# EAGLE board seamonster_buffered1 (EAGLE 8.2.1)
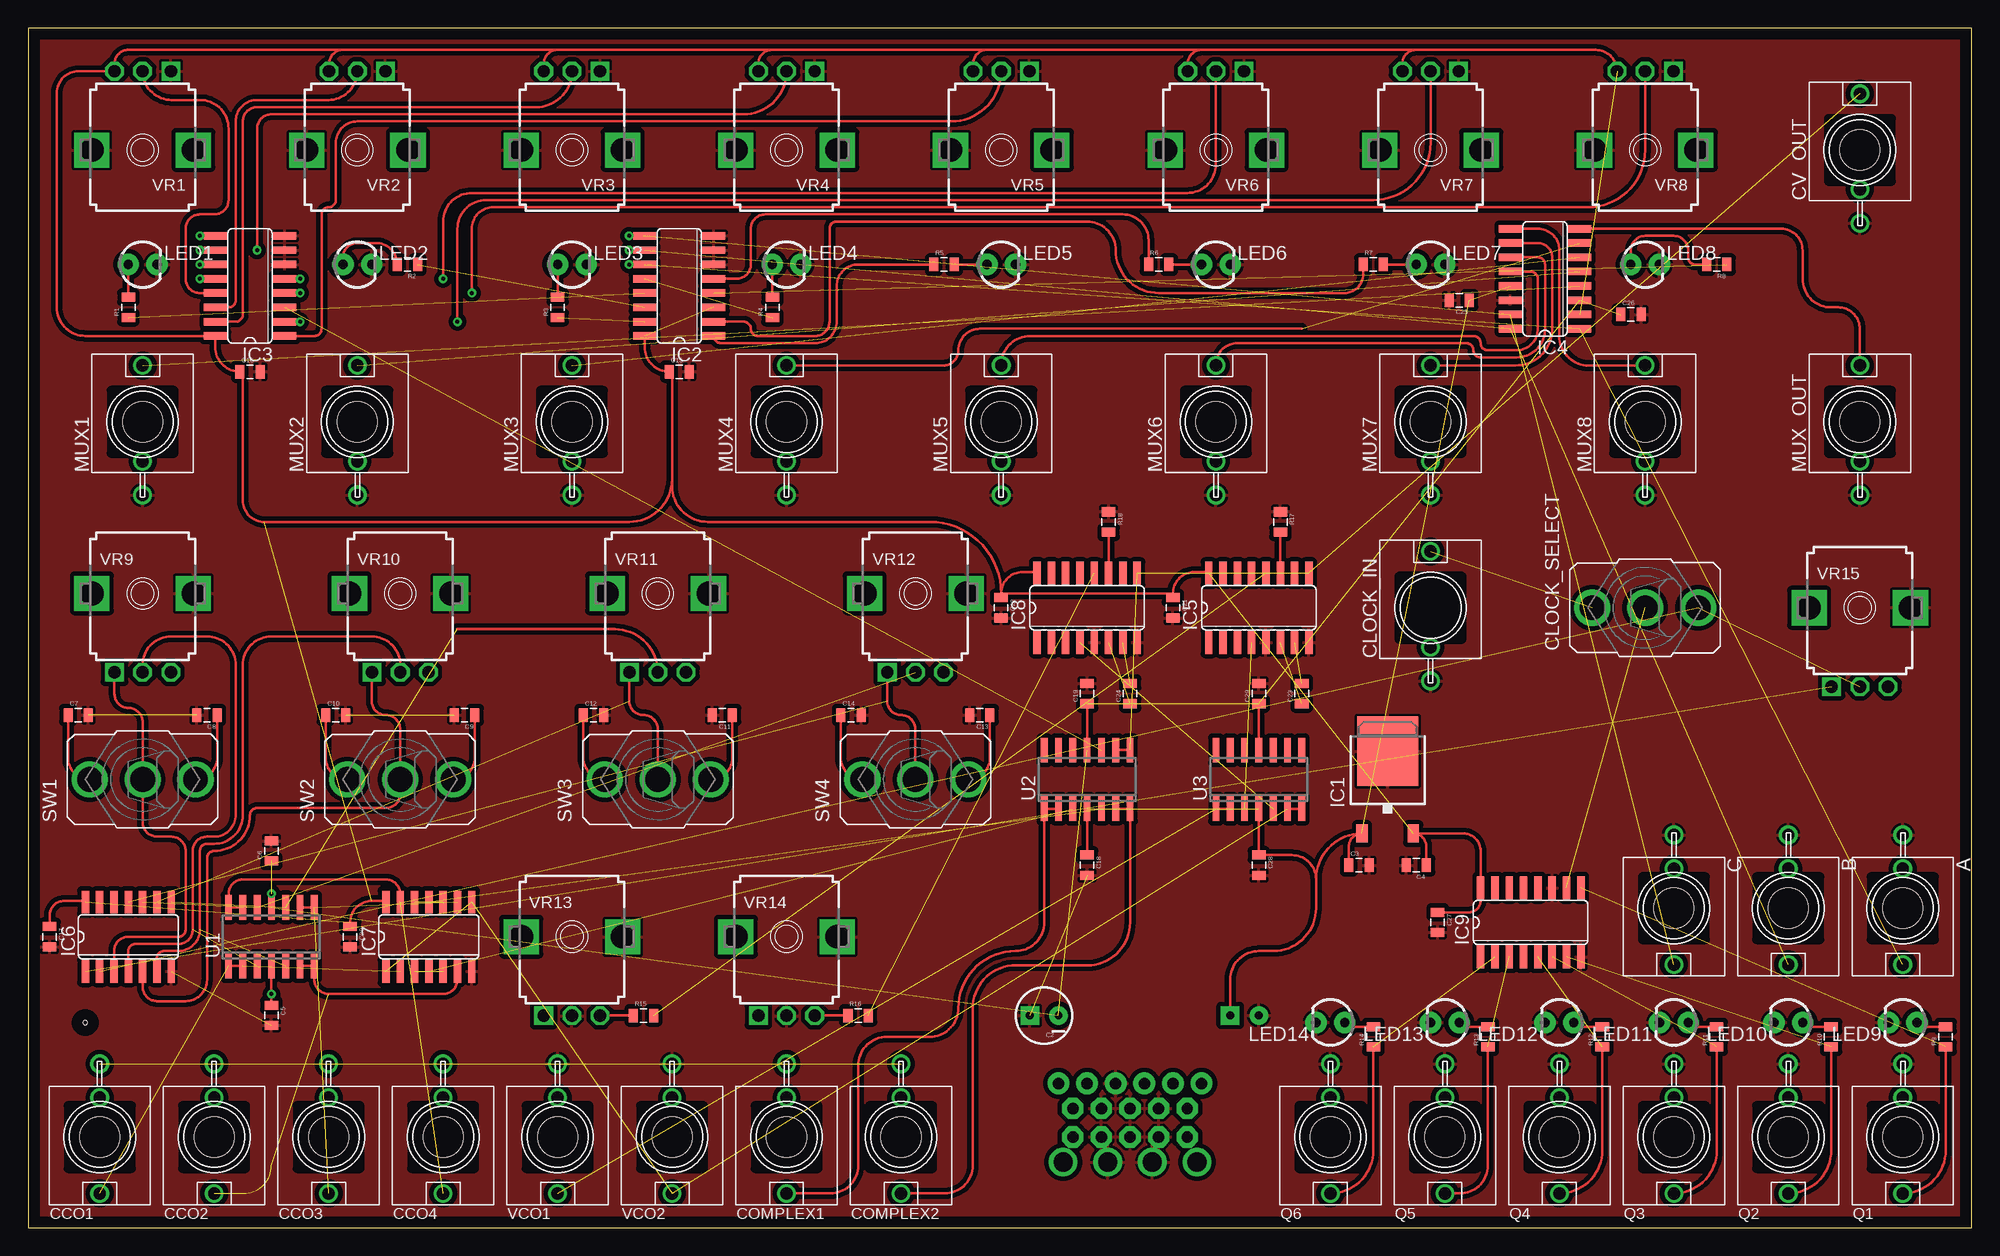
[diagram p0: board, top side]
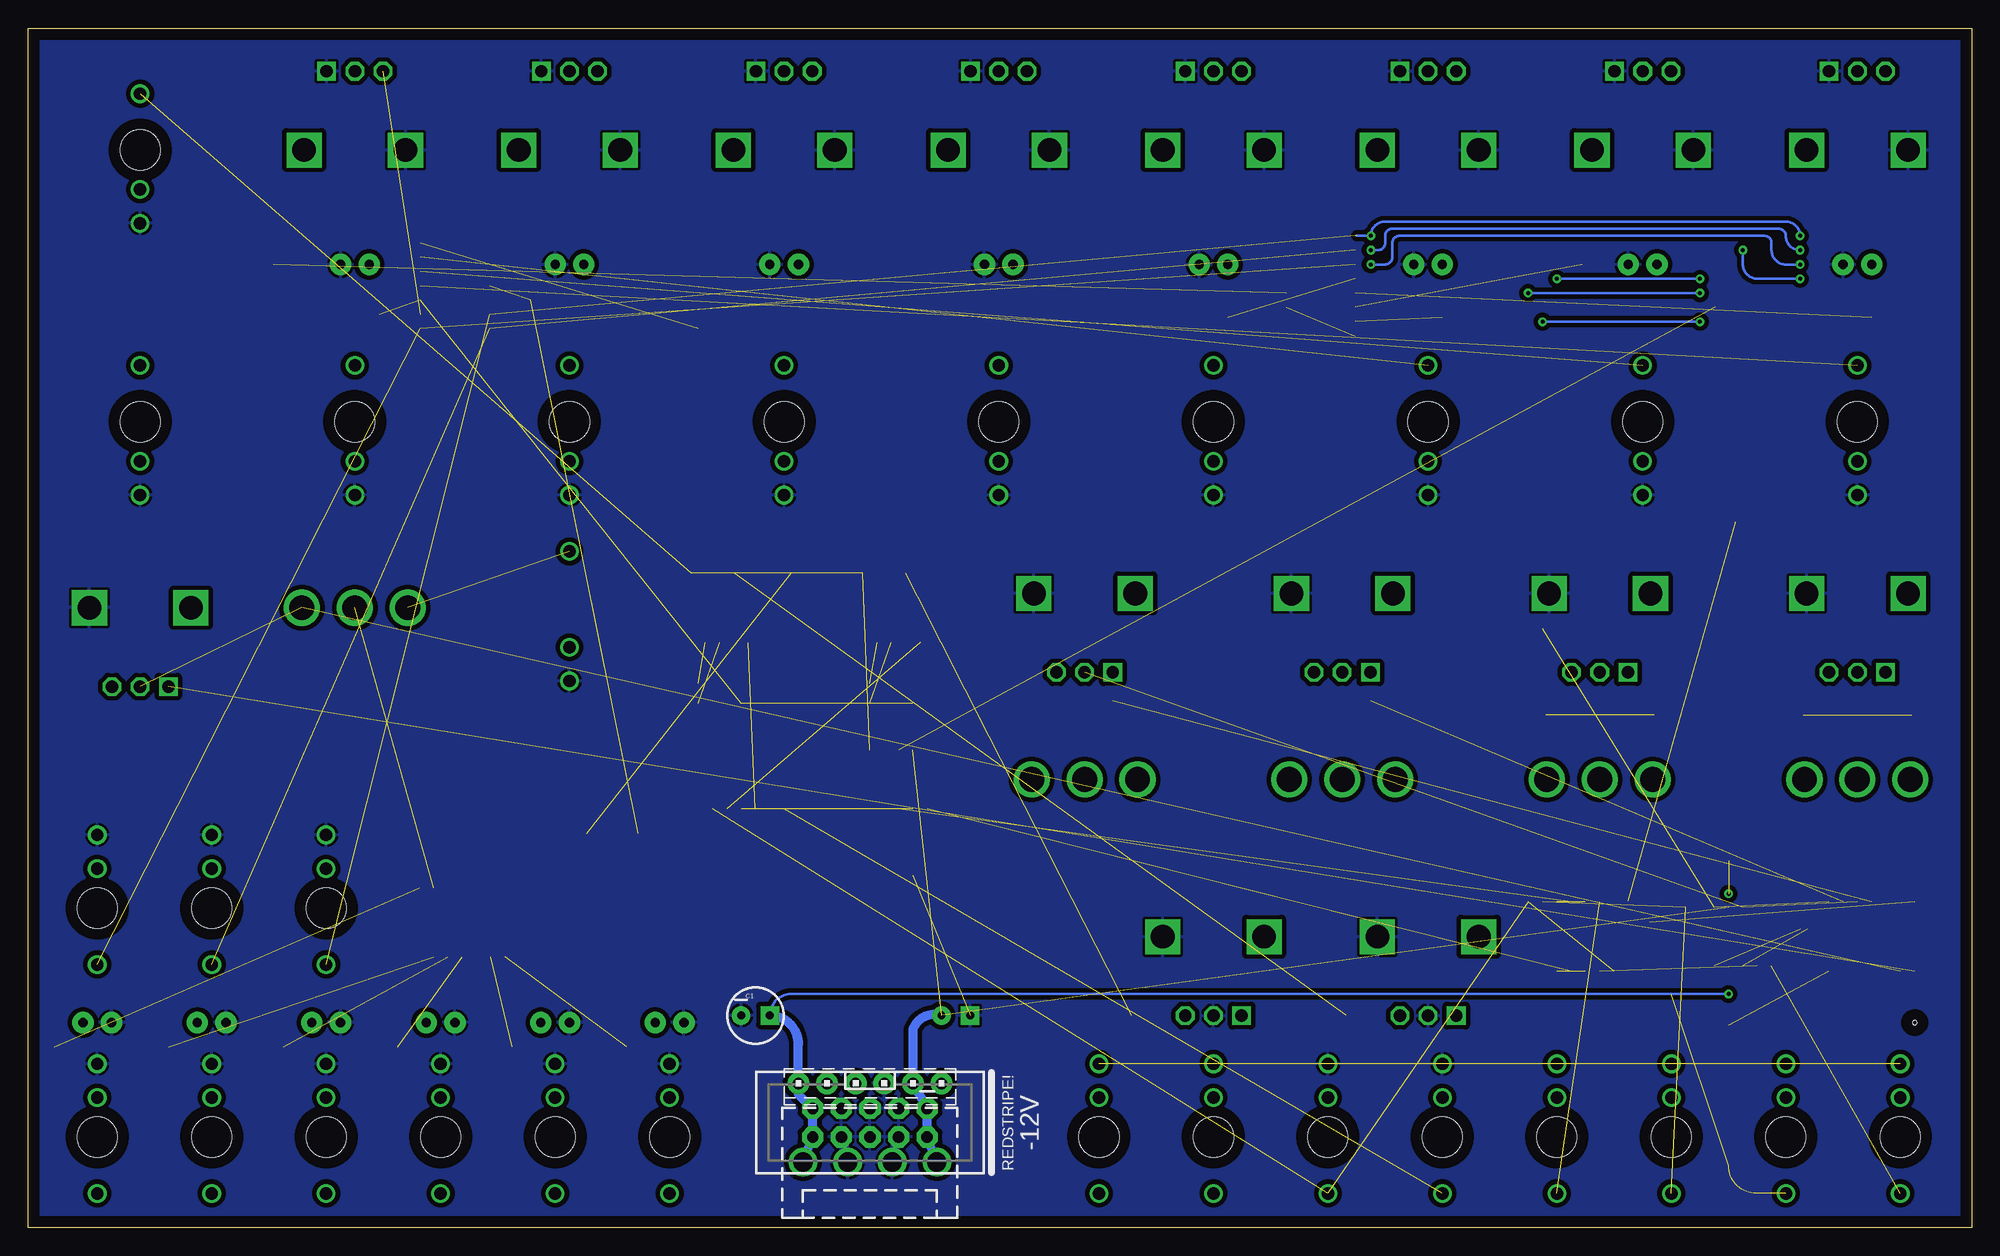
[diagram p1: board, bottom side, seen from below]

Size 172.5 x 106.5 mm. Coordinates in mm from the lower left corner, seen from the top.
Outline: 0,0 172.5,0 172.5,106.5 0,106.5 0,0
Copper layers (1*16): Top 0.035mm / dielectric 1.5mm / Bottom 0.035mm
Design rules "default": minimum track width 6mil, minimum drill 0.35mm, track to track 6mil, track to pad 6mil, pad to pad 6mil, via to via 6mil, smd to smd 6mil, copper to edge 40mil, drill to drill 6mil, minimum pad ring 10mil, minimum via ring 8mil, stop-mask expansion 4mil, vias tented up to drill 0mil, thermal gap 10mil
Holes 0.35 mm at 5.08,18.21
Holes 3.56 mm at 6.35,8.05 16.51,8.05 26.67,8.05 36.83,8.05 46.99,8.05 57.15,8.05 67.31,8.05 77.47,8.05 115.57,8.05 125.73,8.05 135.89,8.05 146.05,8.05 156.21,8.05 166.37,8.05 166.37,28.37 156.21,28.37 146.05,28.37 10.16,71.55 29.21,71.55 48.26,71.55 67.31,71.55 86.36,71.55 105.41,71.55 124.46,71.55 143.51,71.55 162.56,71.55 162.56,95.68

## Footprints (pad centres in the part's own frame; a part is rotated, then mirrored left to right if it is on the bottom)
WQP-PJ301M-12_JACK = drill 1.1: P$1_TIP 0,5; P$2_SWITCH 0,-3.5; P$3_SLEEVE 0,-6.5
CPOL-RADIAL-10UF-25V = drill 0.7 pad 1.651 square: 1 1.27,0 | drill 0.7 pad 1.651: 2 -1.27,0
0805 = smd 0.8 x 1.2: 1 -0.9,0; 2 0.9,0
M9040P = drill 2.2: 1 0,4.699 | drill 2.2 pad 3: 2 0,0; 3 0,-4.699
TO252 = smd 1 x 1.6: 1 -2.28,-4.8; 2 2.28,-4.8 | smd 5.4 x 6.2: 3 0,2.5
SO16 = smd 0.66 x 2.032: 1 -4.445,-3.073; 2 -3.175,-3.073; 3 -1.905,-3.073; 4 -0.635,-3.073; 5 0.635,-3.073; 6 1.905,-3.073; 7 3.175,-3.073; 8 4.445,-3.073; 9 4.445,3.073; 10 3.175,3.073; 11 1.905,3.073; 12 0.635,3.073; 13 -0.635,3.073; 14 -1.905,3.073; 15 -3.175,3.073; 16 -4.445,3.073
SO14 = smd 0.66 x 2.032: 1 -3.81,-3.073; 2 -2.54,-3.073; 3 -1.27,-3.073; 4 0,-3.073; 5 1.27,-3.073; 6 2.54,-3.073; 7 3.81,-3.073; 8 3.81,3.073; 9 2.54,3.073; 10 1.27,3.073; 11 0,3.073; 12 -1.27,3.073; 13 -2.54,3.073; 14 -3.81,3.073
LED3MM = drill 0.813 pad 1.88: A -1.27,0; K 1.27,0
SO14' = smd 0.6 x 2.2: 1 -3.81,-2.6; 2 -2.54,-2.6; 3 -1.27,-2.6; 4 0,-2.6; 5 1.27,-2.6; 6 2.54,-2.6; 7 3.81,-2.6; 8 3.81,2.6; 9 2.54,2.6; 10 1.27,2.6; 11 0,2.6; 12 -1.27,2.6; 13 -2.54,2.6; 14 -3.81,2.6
COMBO_POWER = drill 1.016 pad 1.93: +5V-DOTCOM 1.27,-3.493; COM-DOTCOM -1.27,-3.493; KEY-DOTCOM 3.81,-3.493; NA-DOTCOM -6.35,-3.493; V+DOTCOM 6.35,-3.493; V-DOTCOM -3.81,-3.493 | drill 1.016 pad 1.88 octagon: COM-EURO1 -2.54,-1.27; COM-EURO2 -2.54,1.27; COM-EURO3 0,-1.27; COM-EURO4 0,1.27; COM-EURO5 2.54,-1.27; COM-EURO6 2.54,1.27; V+EURO1 5.08,-1.27; V+EURO2 5.08,1.27; V-EURO1 -5.08,-1.27; V-EURO2 -5.08,1.27 | drill 1.7 pad 2.54: COM-MOTM1 1.98,3.493; COM_MOTM2 -1.98,3.493; V+MOTM 5.94,3.493; V-MOTM -5.94,3.493
9MM_SNAP-IN_POT = drill 1.1 square: 1 -2.5,-7 | drill 1.1 octagon: 2 0,-7; 3 2.5,-7 | drill 2.1 square: CHASSIS1 -4.5,0; CHASSIS2 4.5,0

## Placement (x,y rotation side)
A  THONKICONNNEW  [WQP-PJ301M-12_JACK]  166.37,28.37 180 top
B  THONKICONNNEW  [WQP-PJ301M-12_JACK]  156.21,28.37 180 top
C  THONKICONNNEW  [WQP-PJ301M-12_JACK]  146.05,28.37 180 top
C1  47µF  [CPOL-RADIAL-10UF-25V]  107.95,18.84 0 bottom
C2  47µF  [CPOL-RADIAL-10UF-25V]  90.17,18.84 180 top
C3  0.1µF  [0805]  118.11,32.18 0 top
C4  0.1µF  [0805]  123.19,32.18 180 top
C5  0.1µF  [0805]  21.59,18.84 270 top
C6  0.1µF  [0805]  21.59,33.45 90 top
C7  0.1µF  [0805]  4.45,45.52 0 top
C8  1µF  [0805]  15.88,45.52 180 top
C9  1µF  [0805]  38.73,45.52 180 top
C10  0.1µF  [0805]  27.3,45.52 0 top
C11  1µF  [0805]  61.59,45.52 180 top
C12  0.1µF  [0805]  50.16,45.52 0 top
C13  1µF  [0805]  84.45,45.52 180 top
C14  0.1µF  [0805]  73.03,45.52 0 top
C15  0.1µF  [0805]  57.78,76 0 top
C16  0.1µF  [0805]  19.68,76 0 top
C17  0.1µF  [0805]  1.91,25.83 270 top
C18  0.1µF  [0805]  93.98,32.18 270 top
C19  0.1µF  [0805]  93.98,47.42 90 top
C20  0.1µF  [0805]  28.57,25.83 270 top
C21  0.1µF  [0805]  101.6,55.04 270 top
C22  0.1µF  [0805]  86.36,55.04 270 top
C23  1µF  [0805]  113.03,47.42 90 top
C24  1µF  [0805]  97.79,47.42 90 top
C25  0.1µF  [0805]  127,82.34 180 top
C26  0.1µF  [0805]  142.24,81.08 0 top
C27  0.1µF  [0805]  125.09,27.1 270 top
C28  0.1µF  [0805]  109.22,32.18 270 top
C29  0.1µF  [0805]  109.22,47.42 90 top
CCO1  THONKICONNNEW  [WQP-PJ301M-12_JACK]  6.35,8.05 180 top
CCO2  THONKICONNNEW  [WQP-PJ301M-12_JACK]  16.51,8.05 180 top
CCO3  THONKICONNNEW  [WQP-PJ301M-12_JACK]  26.67,8.05 180 top
CCO4  THONKICONNNEW  [WQP-PJ301M-12_JACK]  36.83,8.05 180 top
CLOCK_IN  THONKICONNNEW  [WQP-PJ301M-12_JACK]  124.46,55.04 0 top
CLOCK_SELECT  SPDT ON-ON  [M9040P]  143.51,55.04 90 top
COMPLEX1  THONKICONNNEW  [WQP-PJ301M-12_JACK]  67.31,8.05 180 top
COMPLEX2  THONKICONNNEW  [WQP-PJ301M-12_JACK]  77.47,8.05 180 top
CV_OUT  THONKICONNNEW  [WQP-PJ301M-12_JACK]  162.56,95.68 0 top
IC1  7808DT  [TO252]  120.65,39.8 0 top
IC2  4051D  [SO16]  57.78,83.61 90 top
IC3  4051D  [SO16]  19.68,83.61 90 top
IC4  DG408DY  [SO16]  134.62,84.25 90 top
IC5  4046D  [SO16]  109.22,55.04 0 top
IC6  40106D  [SO14]  8.89,25.83 0 top
IC7  4070D  [SO14]  35.56,25.83 0 top
IC8  4046D  [SO16]  93.98,55.04 0 top
IC9  4040D  [SO16]  133.35,27.1 0 top
LED1  [LED3MM]  10.16,85.52 0 top
LED2  [LED3MM]  29.21,85.52 0 top
LED3  [LED3MM]  48.26,85.52 0 top
LED4  [LED3MM]  67.31,85.52 0 top
LED5  [LED3MM]  86.36,85.52 0 top
LED6  [LED3MM]  105.41,85.52 0 top
LED7  [LED3MM]  124.46,85.52 0 top
LED8  [LED3MM]  143.51,85.52 0 top
LED9  [LED3MM]  166.37,18.21 180 top
LED10  [LED3MM]  156.21,18.21 180 top
LED11  [LED3MM]  146.05,18.21 180 top
LED12  [LED3MM]  135.89,18.21 180 top
LED13  [LED3MM]  125.73,18.21 180 top
LED14  [LED3MM]  115.57,18.21 180 top
MUX1  THONKICONNNEW  [WQP-PJ301M-12_JACK]  10.16,71.55 0 top
MUX2  THONKICONNNEW  [WQP-PJ301M-12_JACK]  29.21,71.55 0 top
MUX3  THONKICONNNEW  [WQP-PJ301M-12_JACK]  48.26,71.55 0 top
MUX4  THONKICONNNEW  [WQP-PJ301M-12_JACK]  67.31,71.55 0 top
MUX5  THONKICONNNEW  [WQP-PJ301M-12_JACK]  86.36,71.55 0 top
MUX6  THONKICONNNEW  [WQP-PJ301M-12_JACK]  105.41,71.55 0 top
MUX7  THONKICONNNEW  [WQP-PJ301M-12_JACK]  124.46,71.55 0 top
MUX8  THONKICONNNEW  [WQP-PJ301M-12_JACK]  143.51,71.55 0 top
MUX_OUT  THONKICONNNEW  [WQP-PJ301M-12_JACK]  162.56,71.55 0 top
Q1  THONKICONNNEW  [WQP-PJ301M-12_JACK]  166.37,8.05 180 top
Q2  THONKICONNNEW  [WQP-PJ301M-12_JACK]  156.21,8.05 180 top
Q3  THONKICONNNEW  [WQP-PJ301M-12_JACK]  146.05,8.05 180 top
Q4  THONKICONNNEW  [WQP-PJ301M-12_JACK]  135.89,8.05 180 top
Q5  THONKICONNNEW  [WQP-PJ301M-12_JACK]  125.73,8.05 180 top
Q6  THONKICONNNEW  [WQP-PJ301M-12_JACK]  115.57,8.05 180 top
R1  [0805]  8.89,81.71 90 top
R2  [0805]  33.66,85.52 180 top
R3  [0805]  46.99,81.71 90 top
R4  [0805]  66.04,81.71 90 top
R5  [0805]  81.28,85.52 0 top
R6  [0805]  100.33,85.52 0 top
R7  [0805]  119.38,85.52 0 top
R8  [0805]  149.86,85.52 180 top
R9  [0805]  170.18,16.94 90 top
R10  [0805]  160.02,16.94 90 top
R11  [0805]  149.86,16.94 90 top
R12  [0805]  139.7,16.94 90 top
R13  [0805]  129.54,16.94 90 top
R14  [0805]  119.38,16.94 90 top
R15  [0805]  54.61,18.84 0 top
R16  [0805]  73.66,18.84 0 top
R17  [0805]  111.12,62.66 270 top
R18  [0805]  95.89,62.66 270 top
SW1  SPDT ON-ON  [M9040P]  10.16,39.8 90 top
SW2  SPDT ON-ON  [M9040P]  33.02,39.8 90 top
SW3  SPDT ON-ON  [M9040P]  55.88,39.8 90 top
SW4  SPDT ON-ON  [M9040P]  78.74,39.8 90 top
U1  TL084  [SO14']  21.59,25.83 0 top
U2  TL084  [SO14']  93.98,39.8 0 top
U3  TL084  [SO14']  109.22,39.8 0 top
U$1  COMBO_POWER  [COMBO_POWER]  97.79,9.32 180 bottom
VCO1  THONKICONNNEW  [WQP-PJ301M-12_JACK]  46.99,8.05 180 top
VCO2  THONKICONNNEW  [WQP-PJ301M-12_JACK]  57.15,8.05 180 top
VR1  100KΩ  [9MM_SNAP-IN_POT]  10.16,95.68 180 top
VR2  100KΩ  [9MM_SNAP-IN_POT]  29.21,95.68 180 top
VR3  100KΩ  [9MM_SNAP-IN_POT]  48.26,95.68 180 top
VR4  100KΩ  [9MM_SNAP-IN_POT]  67.31,95.68 180 top
VR5  100KΩ  [9MM_SNAP-IN_POT]  86.36,95.68 180 top
VR6  100KΩ  [9MM_SNAP-IN_POT]  105.41,95.68 180 top
VR7  100KΩ  [9MM_SNAP-IN_POT]  124.46,95.68 180 top
VR8  100KΩ  [9MM_SNAP-IN_POT]  143.51,95.68 180 top
VR9  100KΩ  [9MM_SNAP-IN_POT]  10.16,56.31 0 top
VR10  100KΩ  [9MM_SNAP-IN_POT]  33.02,56.31 0 top
VR11  100KΩ  [9MM_SNAP-IN_POT]  55.88,56.31 0 top
VR12  100KΩ  [9MM_SNAP-IN_POT]  78.74,56.31 0 top
VR13  1MΩ  [9MM_SNAP-IN_POT]  48.26,25.83 0 top
VR14  1MΩ  [9MM_SNAP-IN_POT]  67.31,25.83 0 top
VR15  100KΩ  [9MM_SNAP-IN_POT]  162.56,55.04 0 top

## Library data of the parts
A B C CCO1-CCO4 CLOCK_IN CLOCK_SELECT COMPLEX1 COMPLEX2 CV_OUT MUX1-MUX8 MUX_OUT Q1-Q6 SW1-SW4 U1-U3 VCO1 VCO2 VR1-VR15 = MusicThingModular
C1-C29 = SparkFun-Capacitors
IC1 = linear
IC2 IC3 IC5-IC9 = 40xx
IC4 = maxim; MPN: DG408DY+T; OC_FARNELL: 1077070; OC_NEWARK: 67K3719
LED1-LED14 = SparkFun-LED
R1-R18 = SparkFun-Resistors
U$1 = combo_power

## Nets
A: A.P$1_TIP IC2.11 IC3.11 IC4.1
B: B.P$1_TIP IC2.10 IC3.10 IC4.16
C: C.P$1_TIP IC2.9 IC3.9 IC4.15
CCO1: IC6.4 U1.3 VR9.2
CCO1_BUFFERED: CCO1.P$1_TIP IC7.2 U1.1 U1.2
CCO2_BUFFERED: CCO2.P$1_TIP IC7.6 U1.6 U1.7
CCO3_BUFFERED: CCO3.P$1_TIP IC7.9 U1.8 U1.9
CCO4_BUFFERED: CCO4.P$1_TIP IC7.13 U1.13 U1.14
COMPLEX_OUT1_BUFFERED: COMPLEX1.P$1_TIP U2.1 U2.2
COMPLEX_OUT2_BUFFERED: COMPLEX2.P$1_TIP U2.6 U2.7
CV_OUT: IC3.3 U2.10
CV_OUT_BUFFERED: CV_OUT.P$1_TIP IC5.9 IC8.9 U2.8 U2.9
GND: A.P$3_SLEEVE B.P$3_SLEEVE C1.2 C2.1 C3.2 C4.2 C5.2 C6.2 C7.2 C8.2 C9.2 C10.2 C11.2 C12.2 C13.2 C14.2 C15.2 C16.2 C17.2 C18.2 C19.2 C20.2 C21.2 C22.2 C25.2 C26.2 C27.2 C28.2 C29.2 C.P$3_SLEEVE CLOCK_IN.P$3_SLEEVE CV_OUT.P$3_SLEEVE IC1.3 IC2.6 IC2.7 IC2.8 IC3.6 IC3.7 IC3.8 IC4.14 IC5.5 IC5.8 IC6.7 IC7.7 IC8.5 IC8.8 IC9.8 IC9.11 LED1.K LED2.K LED3.K LED4.K LED5.K LED6.K LED7.K LED8.K LED9.K LED10.K LED11.K LED12.K LED13.K LED14.K MUX1.P$3_SLEEVE MUX2.P$3_SLEEVE MUX3.P$3_SLEEVE MUX4.P$3_SLEEVE MUX5.P$3_SLEEVE MUX6.P$3_SLEEVE MUX7.P$3_SLEEVE MUX8.P$3_SLEEVE MUX_OUT.P$3_SLEEVE Q1.P$3_SLEEVE Q2.P$3_SLEEVE Q3.P$3_SLEEVE Q4.P$3_SLEEVE Q5.P$3_SLEEVE Q6.P$3_SLEEVE R17.1 R18.1 U$1.COM-DOTCOM U$1.COM-EURO1 U$1.COM-EURO2 U$1.COM-EURO3 U$1.COM-EURO4 U$1.COM-EURO5 U$1.COM-EURO6 U$1.COM-MOTM1 U$1.COM_MOTM2 VCO1.P$3_SLEEVE VCO2.P$3_SLEEVE VR1.1 VR1.CHASSIS2 VR2.1 VR2.CHASSIS2 VR3.1 VR3.CHASSIS2 VR4.1 VR4.CHASSIS2 VR5.1 VR5.CHASSIS2 VR6.1 VR6.CHASSIS2 VR7.1 VR7.CHASSIS2 VR8.1 VR8.CHASSIS2 VR9.CHASSIS2 VR10.CHASSIS2 VR11.CHASSIS2 VR12.CHASSIS2 VR13.2 VR13.CHASSIS2 VR14.2 VR14.CHASSIS2 VR15.CHASSIS2
N$1: IC4.8 MUX_OUT.P$1_TIP
N$2: IC4.4 MUX1.P$1_TIP
N$3: IC4.5 MUX2.P$1_TIP
N$4: IC4.6 MUX3.P$1_TIP
N$5: IC4.7 MUX4.P$1_TIP
N$6: IC4.12 MUX5.P$1_TIP
N$7: IC4.11 MUX6.P$1_TIP
N$8: IC4.10 MUX7.P$1_TIP
N$9: IC4.9 MUX8.P$1_TIP
N$10: LED1.A R1.2
N$11: LED2.A R2.2
N$12: LED3.A R3.2
N$13: LED4.A R4.2
N$14: LED5.A R5.2
N$15: LED6.A R6.2
N$16: LED7.A R7.2
N$17: LED8.A R8.2
N$18: IC3.13 VR1.2
N$19: IC2.13 R1.1
N$20: IC2.14 R2.1
N$21: IC2.15 R3.1
N$22: IC2.12 R4.1
N$23: IC2.1 R5.1
N$24: IC2.5 R6.1
N$25: IC2.2 R7.1
N$26: IC2.4 R8.1
N$27: IC3.14 VR2.2
N$28: IC3.15 VR3.2
N$29: IC3.12 VR4.2
N$30: IC3.1 VR5.2
N$31: IC3.5 VR6.2
N$32: IC3.2 VR7.2
N$33: IC3.4 VR8.2
N$35: IC7.3 IC7.5
N$36: IC7.10 IC7.12
N$38: IC7.4 U2.3
N$39: IC7.11 U2.5
N$40: IC5.12 R15.2
N$41: IC6.1 VR15.1
N$42: R15.1 VR13.3
N$43: CLOCK_SELECT.3 IC6.2 VR15.2
N$44: C23.1 IC5.6
N$45: C23.2 IC5.7
N$46: IC6.3 SW1.2 VR9.1
N$47: C7.1 SW1.1
N$48: C24.1 IC8.6
N$49: C24.2 IC8.7
N$50: CLOCK_SELECT.2 IC9.10
N$51: LED9.A R9.2
N$52: C8.1 SW1.3
N$53: IC6.5 SW2.2 VR10.1
N$54: IC6.6 U1.5 VR10.2
N$55: C10.1 SW2.1
N$56: C9.1 SW2.3
N$57: IC6.8 U1.10 VR11.2
N$58: IC6.9 SW3.2 VR11.1
N$59: C12.1 SW3.1
N$60: C11.1 SW3.3
N$61: IC6.10 U1.12 VR12.2
N$62: IC6.11 SW4.2 VR12.1
N$63: C14.1 SW4.1
N$64: C13.1 SW4.3
N$65: LED10.A R10.2
N$66: LED11.A R11.2
N$67: LED12.A R12.2
N$68: LED13.A R13.2
N$69: LED14.A R14.2
N$70: CLOCK_IN.P$1_TIP CLOCK_SELECT.1
N$71: IC8.12 R16.2
N$72: R16.1 VR14.3
N$73: CCO1.P$3_SLEEVE CCO2.P$3_SLEEVE CCO3.P$3_SLEEVE CCO4.P$3_SLEEVE COMPLEX1.P$3_SLEEVE COMPLEX2.P$3_SLEEVE
N$74: IC8.11 R18.2
N$75: IC5.11 R17.2
Q1: IC9.9 Q1.P$1_TIP R9.1
Q2: IC9.7 Q2.P$1_TIP R10.1
Q3: IC9.6 Q3.P$1_TIP R11.1
Q4: IC9.5 Q4.P$1_TIP R12.1
Q5: IC9.3 Q5.P$1_TIP R13.1
Q6: IC9.2 Q6.P$1_TIP R14.1
V+: C1.1 C3.1 C5.1 C18.1 C25.1 C28.1 IC1.1 IC4.13 U1.4 U2.4 U3.4 U$1.V+DOTCOM U$1.V+EURO1 U$1.V+EURO2 U$1.V+MOTM
V-: C2.2 C6.1 C19.1 C26.1 C29.1 IC4.3 U1.11 U2.11 U3.11 U$1.V-DOTCOM U$1.V-EURO1 U$1.V-EURO2 U$1.V-MOTM
VCC: C4.1 C15.1 C16.1 C17.1 C20.1 C21.1 C22.1 C27.1 IC1.2 IC2.3 IC2.16 IC3.16 IC4.2 IC5.16 IC6.14 IC7.14 IC8.16 IC9.16 VR1.3 VR2.3 VR3.3 VR4.3 VR5.3 VR6.3 VR7.3 VR8.3
VCO1_OUT: IC5.4 U3.3
VCO1_OUT_BUFFERED: U3.1 U3.2 VCO1.P$1_TIP
VCO2_OUT: IC8.4 U3.5
VCO2_OUT_BUFFERED: IC7.1 IC7.8 U3.6 U3.7 VCO2.P$1_TIP

## Tracks (layer width: path | path; a pad name or v marks a point on that pad's centre or on a via)
A  (via drill 0.35)  (2 unrouted)
  Top 0.203: IC3.11 v15.24,85.52 | IC2.11 v53.34,85.52
  Bottom 0.203: v53.34,85.52 52.07,85.52 arc-90 51.44,86.16 51.44,87.42 arc90 50.8,88.06 18.41,88.06 arc90 17.78,87.42 17.78,86.79 arc-90 16.51,85.52 v15.24,85.52
B  (via drill 0.35)  (2 unrouted)
  Top 0.203: v15.24,86.79 IC3.10 | IC2.10 v53.34,86.79
  Bottom 0.203: v53.34,86.79 52.7,86.79 arc-90 52.07,87.42 52.07,88.06 arc90 51.44,88.69 17.14,88.69 arc90 16.51,88.06 arc-90 v15.24,86.79
C  (via drill 0.35)  (3 unrouted)
  Top 0.203: IC3.9 v15.24,88.06
  Bottom 0.203: v15.24,88.06 arc-90 16.51,89.33 52.07,89.33 arc-90 v53.34,88.06 54.61,88.06
CCO1  (1 unrouted)
  Top 0.2: VR9.2 10.16,49.96 arc-90 12.7,52.5 15.88,52.5 arc-90 18.41,49.96 18.41,36.62 arc-90 16.51,34.72 15.88,34.72 arc90 14.61,33.45 14.61,26.47 arc-90 13.34,25.2 9.53,25.2 arc90 8.89,24.56 IC6.4
CCO1_BUFFERED  (2 unrouted)
  Top 0.2: U1.1 U1.2
CCO2_BUFFERED  (3 unrouted)
  Top 0.2: U1.6 U1.7
  Top 0.203: U1.7 25.4,22.02 arc90 26.67,20.75 36.83,20.75 arc90 38.1,22.02 IC7.6
CCO3_BUFFERED  (2 unrouted)
  Top 0.2: U1.9 U1.8
CCO4_BUFFERED  (1 unrouted)
  Top 0.2: U1.14 U1.13
  Top 0.203: IC7.13 33.02,29.64 arc90 31.75,30.91 19.05,30.91 arc90 17.78,29.64 U1.14
COMPLEX_OUT1_BUFFERED
  Top 0.2: U2.2 U2.1 90.17,27.1 arc-90 87.63,24.56 arc90 82.55,19.48 arc-90 80.01,16.94 76.2,16.94 arc90 73.66,14.4 73.66,5.51 arc-90 71.2,3.05 COMPLEX1.P$1_TIP
COMPLEX_OUT2_BUFFERED
  Top 0.2: U2.6 U2.7 97.79,27.1 arc-90 93.98,23.29 87.63,23.29 arc90 83.82,19.48 83.82,5.51 arc-90 81.36,3.05 COMPLEX2.P$1_TIP
CV_OUT  (1 unrouted)
CV_OUT_BUFFERED  (3 unrouted)
  Top 0.2: U2.9 U2.8
GND  (4 unrouted)
  pour Top (isolate 0.406): 0,-0.21 172.72,-0.21 172.72,107.11 0,107.11
  pour Bottom (isolate 0.406): 0,-0.21 172.72,-0.21 172.72,107.11 0,107.11
N$1
  Top 0.203: IC4.8 155.57,88.69 arc-90 157.48,86.79 157.48,84.25 arc90 160.02,81.71 160.66,81.71 arc-90 162.56,79.81 MUX_OUT.P$1_TIP
N$2  (1 unrouted)
N$3  (1 unrouted)
N$4  (1 unrouted)
N$5  (1 unrouted)
  Top 0.203: MUX4.P$1_TIP 81.2,76.55 arc90 82.55,77.9 arc-90 84.45,79.81 113.03,79.81
N$6
  Top 0.203: MUX5.P$1_TIP 86.36,76.63 arc-90 88.9,79.17 128.27,79.17 arc-90 128.91,78.53 arc90 129.54,77.9 132.08,77.9 arc90 133.99,79.81 133.99,84.25 arc90 133.35,84.89 IC4.12
N$7
  Top 0.203: MUX6.P$1_TIP 105.41,76.63 arc-90 107.31,78.53 127.64,78.53 arc-90 128.27,77.9 arc90 128.91,77.27 132.08,77.27 arc90 134.62,79.81 134.62,85.52 arc90 133.99,86.16 IC4.11
N$8
  Top 0.203: MUX7.P$1_TIP 132,76.55 arc90 135.25,79.81 135.25,86.16 arc90 133.99,87.42 IC4.10
N$9
  Top 0.203: MUX8.P$1_TIP 138.51,76.55 arc-90 135.89,79.17 135.89,86.79 arc90 133.99,88.69 IC4.9
N$10
  Top 0.2: R1.2 LED1.A
N$11
  Top 0.203: LED2.A 27.94,86.16 arc-90 29.21,87.42 30.85,87.42 arc-90 R2.2
N$12
  Top 0.2: R3.2 LED3.A
N$13
  Top 0.2: R4.2 LED4.A
N$14
  Top 0.2: LED5.A R5.2
N$15
  Top 0.2: LED6.A R6.2
N$16
  Top 0.2: LED7.A R7.2
N$17
  Top 0.2: LED8.A 142.24,86.79 arc-90 143.51,88.06 146.05,88.06 arc-90 147.32,86.79 147.32,86.16 arc90 147.96,85.52 R8.2
N$18
  Top 0.203: VR1.2 arc90 12.71,100.12 15.24,100.12 arc-90 17.78,97.58 17.78,91.23 arc-90 16.51,89.97 15.24,89.97 arc90 13.97,88.69 13.97,84.25 arc90 15.24,82.98 IC3.13
N$19  (1 unrouted)
N$20  (1 unrouted)
N$21  (1 unrouted)
N$22  (1 unrouted)
N$23
  Top 0.203: R5.1 73.66,85.52 arc90 71.75,83.61 71.75,82.98 71.75,80.44 arc-90 69.85,78.53 61.49,78.53 arc-90 IC2.1
N$24
  Top 0.203: IC2.5 62.87,84.25 arc90 64.14,85.52 64.14,88.69 arc-90 65.41,89.97 97.16,89.97 arc-90 99.43,87.69 R6.1
N$25
  Top 0.203: R7.1 118.48,84.62 arc-90 116.84,82.98 100.33,82.98 arc-90 96.52,86.79 arc90 93.98,89.33 71.75,89.33 arc90 71.12,88.69 71.12,80.44 arc-90 69.85,79.17 64.77,79.17 arc-90 64.14,79.81 arc90 63.5,80.44 IC2.2
N$26  (1 unrouted)
N$27
  Top 0.203: VR2.2 arc-90 26.66,100.12 20.32,100.12 arc90 18.41,98.22 18.41,82.34 arc-90 17.78,81.71 IC3.14
N$28
  Top 0.203: VR3.2 arc-90 45.07,99.49 20.32,99.49 arc90 19.05,98.22 19.05,81.08 arc-90 18.41,80.44 IC3.15
N$29  (via drill 0.35)
  Top 0.203: VR4.2 arc-90 63.48,98.86 21.59,98.86 arc90 20.32,97.58 v20.32,86.79 | IC3.12 v15.24,84.25
  Bottom 0.203: v15.24,84.25 19.05,84.25 arc90 20.32,85.52 v20.32,86.79
N$30
  Top 0.203: VR5.2 arc-90 81.9,98.22 29.21,98.22 arc90 27.3,96.31 27.3,91.23 arc-90 26.67,90.6 arc90 26.04,89.97 26.04,79.81 arc-90 25.4,79.17 IC3.1
N$31  (via drill 0.35)
  Top 0.203: VR6.2 105.41,94.41 arc-90 102.87,91.87 41.91,91.87 39.37,91.87 arc90 36.83,89.33 v36.83,84.25 | IC3.5 v24.13,84.25
  Bottom 0.203: v36.83,84.25 v24.13,84.25
N$32  (via drill 0.35)
  Top 0.203: VR7.2 124.46,96.31 arc-90 119.38,91.23 40.64,91.23 arc90 38.1,88.69 v38.1,80.44 | IC3.2 v24.13,80.44
  Bottom 0.203: v38.1,80.44 v24.13,80.44
N$33  (via drill 0.35)
  Top 0.203: VR8.2 143.51,95.68 arc-90 138.43,90.6 41.27,90.6 arc90 39.37,88.69 v39.37,82.98 | IC3.4 v24.13,82.98
  Bottom 0.203: v24.13,82.98 v39.37,82.98
N$35  (1 unrouted)
N$36  (1 unrouted)
N$38  (1 unrouted)
N$39  (1 unrouted)
N$40  (1 unrouted)
N$41  (1 unrouted)
N$42
  Top 0.203: R15.1 50.77,18.84 arc90 VR13.3
N$43  (2 unrouted)
N$44  (1 unrouted)
N$45  (1 unrouted)
N$46
  Top 0.2: IC6.3 7.62,24.56 arc-90 8.89,25.83 13.34,25.83 arc90 13.97,26.47 13.97,33.45 arc90 12.7,34.72 11.43,34.72 arc-90 10.16,35.99 SW1.2 10.16,44.88 arc90 8.89,46.15 arc-90 7.66,47.38 VR9.1
N$47
  Top 0.2: C7.1 3.54,41.72 arc90 SW1.1
N$48  (1 unrouted)
N$49  (1 unrouted)
N$50  (1 unrouted)
N$51
  Top 0.203: LED9.A arc90 168.01,17.84 R9.2
N$52
  Top 0.2: C8.1 16.77,41.72 arc-90 SW1.3
N$53
  Top 0.2: VR10.1 arc90 30.48,49.27 30.48,46.78 arc90 31.75,45.52 arc-90 33.02,44.24 SW2.2 33.02,38.53 arc-90 31.75,37.26 20.32,37.26 arc90 19.68,36.62 arc-90 16.51,33.45 arc90 15.88,32.81 15.88,22.02 arc-90 13.97,20.11 11.43,20.11 arc-90 10.16,21.38 IC6.5
N$54  (1 unrouted)
  Top 0.2: VR10.2 33.02,49.96 arc90 30.48,52.5 21.59,52.5 arc90 19.05,49.96 19.05,36.62 arc-90 16.51,34.09 15.88,34.09 arc90 15.24,33.45 15.24,26.47 arc-90 13.34,24.56 12.06,24.56 arc90 11.43,23.92 IC6.6
N$55
  Top 0.2: C10.1 26.41,41.72 arc90 SW2.1
N$56
  Top 0.2: C9.1 39.63,41.72 arc-90 SW2.3
N$57  (2 unrouted)
  Top 0.2: VR11.2 arc90 52.05,53.14 50.16,53.14 38.1,53.14
N$58  (1 unrouted)
  Top 0.2: VR11.1 arc90 53.34,49.27 53.34,46.78 arc90 54.61,45.52 arc-90 55.88,44.24 SW3.2
N$59
  Top 0.2: C12.1 49.27,41.72 arc90 SW3.1
N$60
  Top 0.2: C11.1 62.49,41.72 arc-90 SW3.3
N$61  (2 unrouted)
N$62  (1 unrouted)
  Top 0.2: VR12.1 76.24,46.74 arc90 77.47,45.52 arc-90 78.74,44.24 SW4.2
N$63
  Top 0.2: C14.1 72.12,41.72 arc90 SW4.1
N$64
  Top 0.2: C13.1 85.36,41.72 arc-90 SW4.3
N$65
  Top 0.203: LED10.A arc90 157.85,17.84 R10.2
N$66
  Top 0.203: LED11.A arc90 147.69,17.84 R11.2
N$67
  Top 0.203: LED12.A arc90 137.53,17.84 R12.2
N$68
  Top 0.203: LED13.A arc90 127.37,17.84 R13.2
N$69
  Top 0.203: LED14.A arc90 117.21,17.84 R14.2
N$70  (1 unrouted)
N$71  (1 unrouted)
N$72
  Top 0.203: R16.1 69.83,18.84 arc90 VR14.3
N$73  (5 unrouted)
N$74
  Top 0.2: IC8.11 R18.2
N$75
  Top 0.2: IC5.11 R17.2
Q1  (1 unrouted)
  Top 0.203: R9.1 170.18,6.86 arc-90 Q1.P$1_TIP
Q2  (1 unrouted)
  Top 0.203: R10.1 160.02,6.86 arc-90 Q2.P$1_TIP
Q3  (1 unrouted)
  Top 0.203: R11.1 149.86,6.86 arc-90 Q3.P$1_TIP
Q4  (1 unrouted)
  Top 0.203: R12.1 139.7,6.86 arc-90 Q4.P$1_TIP
Q5  (1 unrouted)
  Top 0.203: Q5.P$1_TIP 127.08,3.05 arc90 129.54,5.51 R13.1
Q6  (1 unrouted)
  Top 0.203: R14.1 119.38,6.86 arc-90 Q6.P$1_TIP
V+  (via drill 0.35)  (3 unrouted)
  Top 0.2: C28.1 U3.4 | C18.1 U2.4
  Top 0.203: U1.4 v21.59,20.75 C5.1 | 114.3,30.93 arc-90 IC1.1 arc90 117.21,33.84 C3.1 | 114.3,30.93 114.3,28.37 arc-90 110.49,24.56 109.22,24.56 arc90 106.68,22.02 C1.1 | 114.3,30.93 arc90 112.15,33.08 C28.1
  Bottom 0.203: C1.1 arc90 104.78,20.75 v21.59,20.75
  Bottom 0.813: U$1.V+MOTM U$1.V+EURO2 U$1.V+EURO1 104.14,11.86 U$1.V+DOTCOM 104.14,16.3 arc-90 C1.1
V-  (via drill 0.35)  (6 unrouted)
  Top 0.2: U2.11 C19.1 | U3.11 C29.1
  Top 0.203: U1.11 v21.59,29.64
  Bottom 0.813: U$1.V-MOTM U$1.V-EURO2 U$1.V-EURO1 U$1.V-DOTCOM 93.98,17.57 arc90 C2.2
VCC  (5 unrouted)
  Top 0.2: VR1.3 7.66,103.34 arc-90 8.89,104.57 27.94,104.57 | 46.99,104.57 27.94,104.57 | 66.04,104.57 46.99,104.57 | 85.09,104.57 66.04,104.57 | 104.14,104.57 85.09,104.57 | 123.19,104.57 104.14,104.57 | 123.19,104.57 139.12,104.57 arc-90 VR8.3 | VR2.3 26.71,103.34 arc-90 27.94,104.57 | VR3.3 45.76,103.34 arc-90 46.99,104.57 | VR4.3 64.81,103.34 arc-90 66.04,104.57 | VR5.3 83.86,103.34 arc-90 85.09,104.57 | VR6.3 102.91,103.34 arc-90 104.14,104.57 | VR7.3 121.96,103.34 arc-90 123.19,104.57 | C17.1 1.91,27.73 arc-90 3.17,29.01 4.98,29.01 arc-90 IC6.14 | C20.1 28.57,27.1 arc-90 30.48,29.01 31.65,29.01 arc-90 IC7.14 | C21.1 101.6,56.31 arc-90 103.5,58.22 104.67,58.22 arc-90 IC5.16 | 86.36,56.31 arc-90 88.27,58.22 89.43,58.22 arc-90 IC8.16
  Top 0.203: IC2.16 54.71,78.17 arc90 C15.1 arc-90 57.15,75.73 57.15,66.47 | 57.15,66.47 arc-90 53.34,62.66 20.95,62.66 arc-90 19.05,64.56 19.05,75.73 arc90 C16.1 arc-90 16.61,78.17 IC3.16 5.08,79.17 arc-90 2.54,81.71 2.54,100.76 arc-90 4.45,102.67 7.64,102.67 arc90 VR1.3 | C4.1 124.09,33.84 arc90 IC1.2 127.36,35 arc-90 128.91,33.45 IC9.16 128.91,29.01 arc-90 127.9,28 C27.1 | 86.36,56.31 C22.1 | 101.6,56.31 86.36,56.31 | 57.15,66.47 57.15,65.83 arc90 60.33,62.66 80.01,62.66 arc-90 86.36,56.31
VCO1_OUT  (1 unrouted)
VCO1_OUT_BUFFERED  (1 unrouted)
  Top 0.2: U3.1 U3.2
VCO2_OUT  (1 unrouted)
VCO2_OUT_BUFFERED  (3 unrouted)
  Top 0.2: U3.6 U3.7